# Altium PCB StepperControllerNema11.PcbDoc
Units mm, origin at the board's own origin, x right, y up, seen from the top; angles counter-clockwise.
Board outline 28 x 28 mm, 2 copper layers (Top Layer, Bottom Layer); 16 components, 19 nets, 72 pads, 34 vias.
Unrouted connection lines stored in the file: 3.
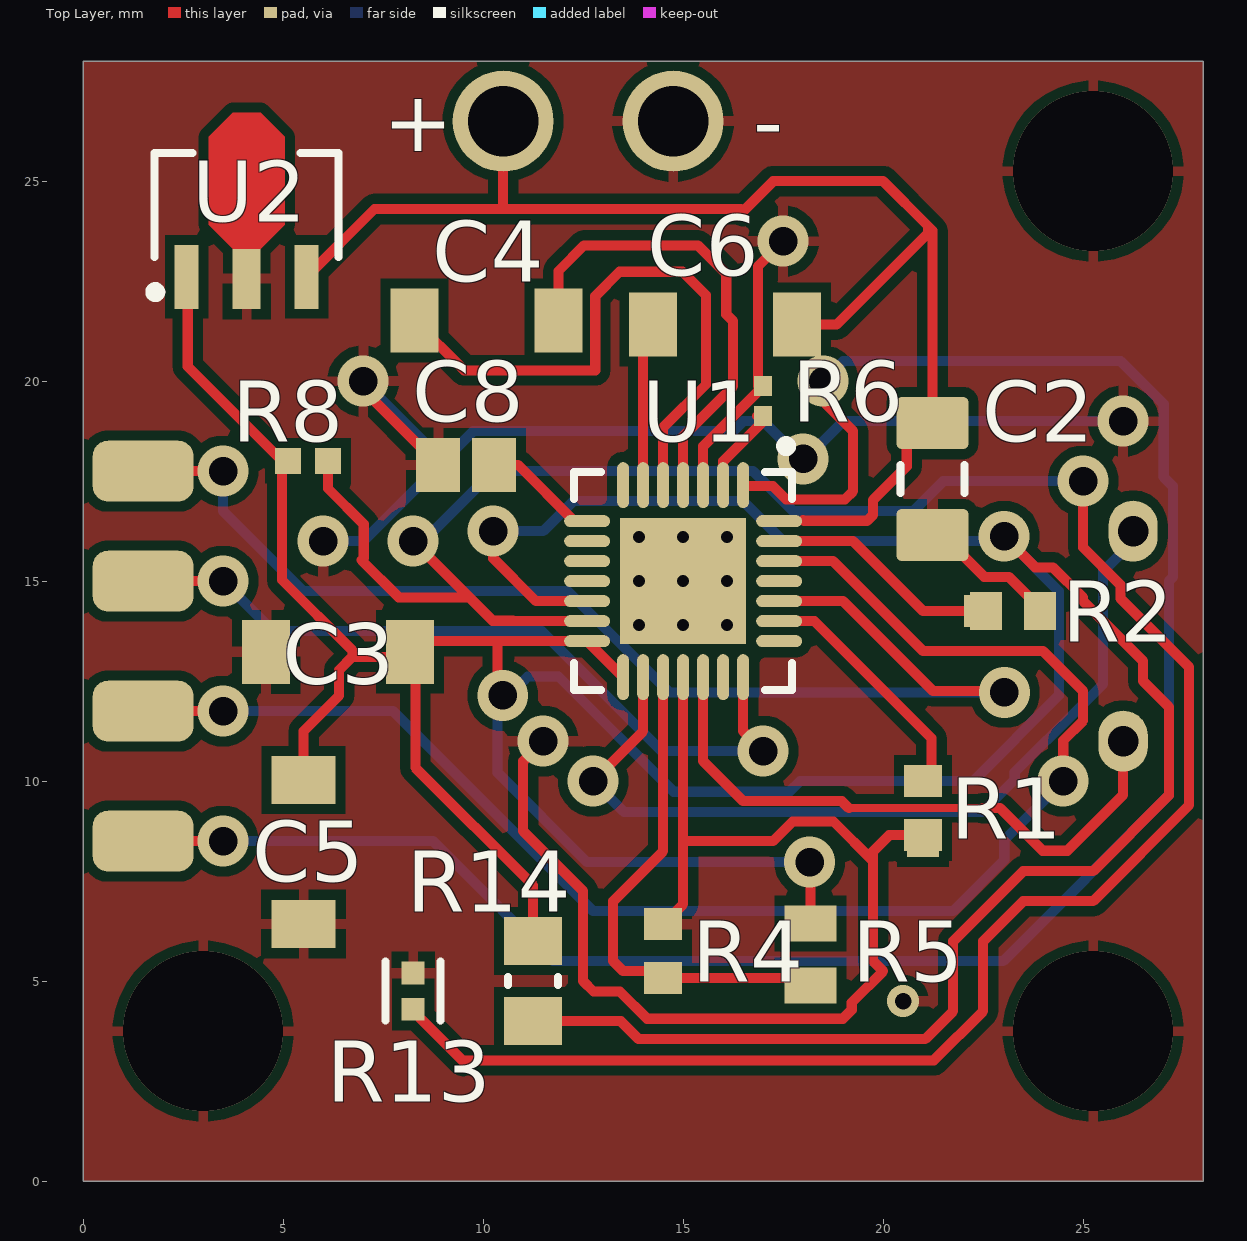
[diagram p0: Top Layer view]
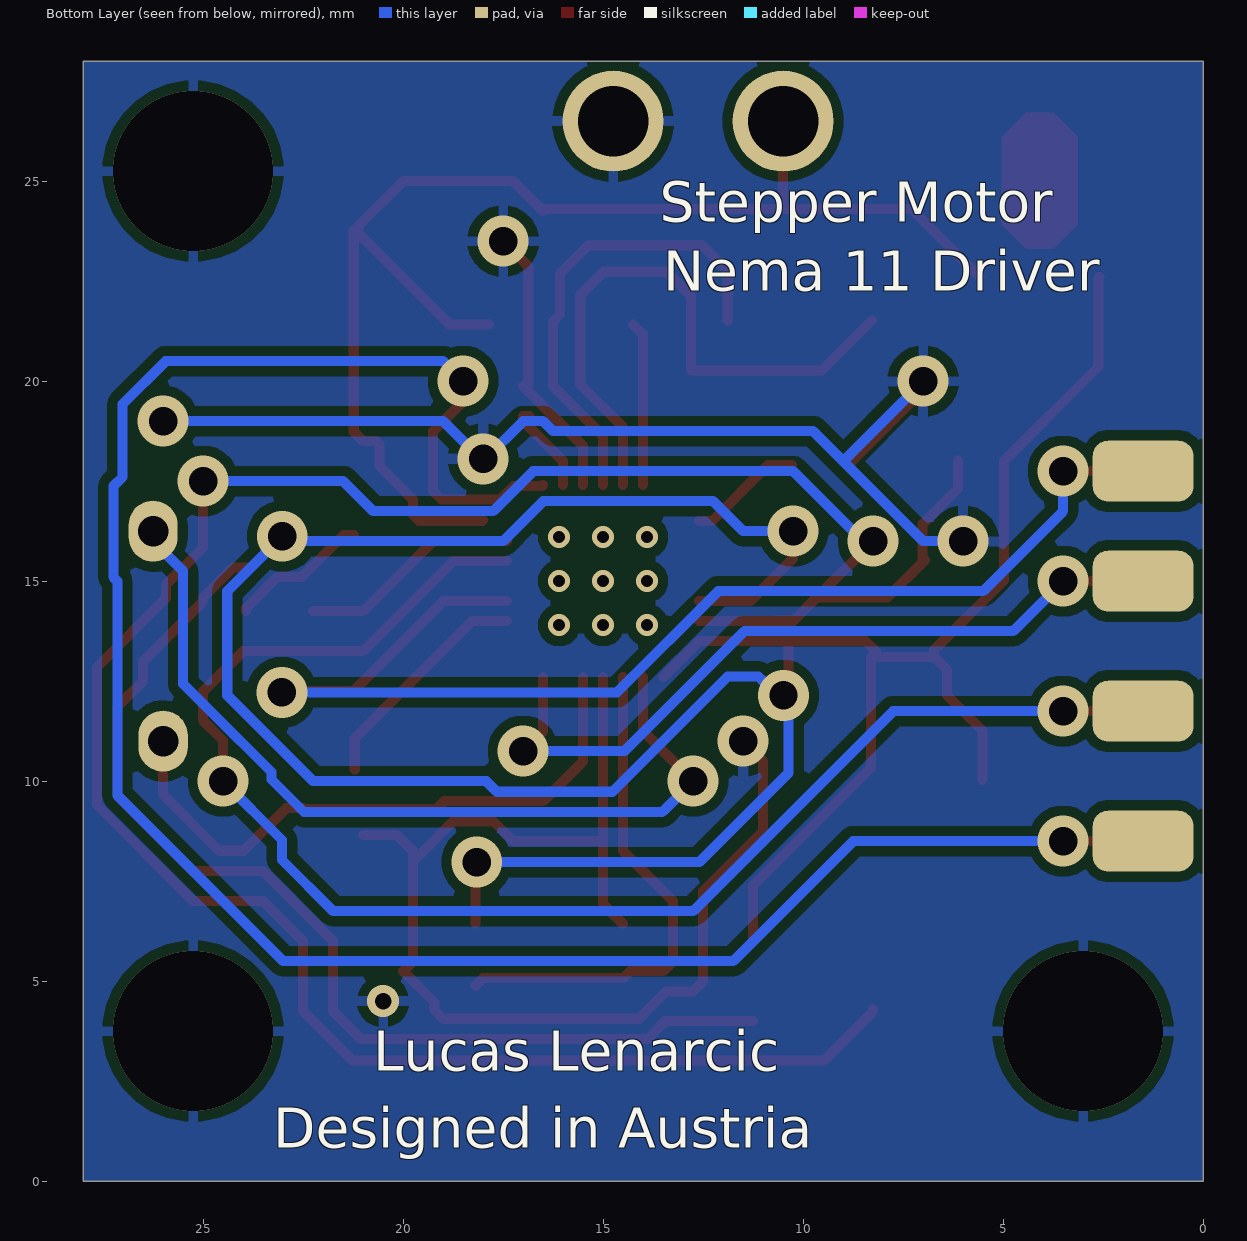
[diagram p1: Bottom Layer view, seen from below]

## Layer stack, top to bottom
Top Solder: solder mask 0.0102, Solder Resist, Dk 3.5
Top Layer: signal copper 0.0356
Dielectric 1: dielectric 0.32, FR-4, Dk 4.8
Bottom Layer: signal copper 0.0356
Bottom Solder: solder mask 0.0102, Solder Resist, Dk 3.5

## Board outline
0,0 28,0 28,28 0,28

## Design rules (kind name [scope] priority, off if disabled: settings)
AssemblyTestPointUsage AssemblyTestPointUsage_1 [All] p2:
AssemblyTestpoint AssemblyTestpoint_1 [All] p2: testpointundercomponent=TRUE minsize=1.016 maxsize=2.54 preferedsize=1.524 minholesize=0 maxholesize=1.016 preferedholesize=0.813 testpointgrid=0.025 usegrid=TRUE gridtolerance=0 allowsidetop=TRUE allowsidebottom=TRUE
Clearance [All] p1: gap=0.254 ignorepadtopadclearanceinfootprint=FALSE except(0: Arc-Hole Track-Hole SMDPad-Hole THPad-Hole Via-Hole Fill-Hole Poly-Hole Region-Hole Text-Hole)
Clearance Clearance_1 [All] p2: gap=0.254 ignorepadtopadclearanceinfootprint=FALSE except(0: Arc-Hole Track-Hole SMDPad-Hole THPad-Hole Via-Hole Fill-Hole Poly-Hole Region-Hole Text-Hole)
ComponentClearance ComponentClearance_1 [All] p2: gap=0.254 collisioncheckmode=3 verticalgap=0.254 showdistances=FALSE
DiffPairsRouting DiffPairsRouting_1 [All] p2: maxlimit=0.254 minlimit=0.254 mostfreqgap=0.254 toplayer_minwidth=0.381 toplayer_maxwidth=0.381 toplayer_prefwidth=0.381 bottomlayer_minwidth=0.381 bottomlayer_maxwidth=0.381 bottomlayer_prefwidth=0.381 maxuncoupledlength=12.7
FabricationTestPointUsage FabricationTestPointUsage_1 [All] p2: valid=0 allowmultiple=FALSE
FabricationTestpoint FabricationTestpoint_1 [All] p2: side=3 testpointundercomponent=TRUE minsize=1.016 maxsize=2.54 preferedsize=1.524 minholesize=0 maxholesize=1.016 preferedholesize=0.813 testpointgrid=0.025 allowsidetop=TRUE allowsidebottom=TRUE usegrid=TRUE gridtolerance=0
FanoutControl Fanout_LCC [IsLCC] p1: bgadir=Out bgaviamode=Centered fanoutstyle=Auto fanoutdirection=Alternating viagrid=0.025 // Fanout_LCC (Default Rule)
FanoutControl Fanout_BGA [IsBGA] p2: bgadir=Out bgaviamode=Centered fanoutstyle=Auto fanoutdirection=Alternating viagrid=0.025 // Fanout_BGA (Default Rule)
FanoutControl Fanout_Default [All] p4: bgadir=Out bgaviamode=Centered fanoutstyle=Auto fanoutdirection=Alternating viagrid=0.025 // Fanout_Default (Default Rule)
FanoutControl Fanout_Small [(CompPinCount < 5)] p5: bgadir=Out bgaviamode=Centered fanoutstyle=Auto fanoutdirection=OutThenIn viagrid=0.025 // Fanout_Small (Default Rule)
FanoutControl Fanout_BGA_1 [IsBGA] p6: bgadir=Out bgaviamode=Centered fanoutstyle=Auto fanoutdirection=Alternating viagrid=0.025 // Fanout_BGA (Default Rule)
FanoutControl Fanout_LCC_1 [IsLCC] p7: bgadir=Out bgaviamode=Centered fanoutstyle=Auto fanoutdirection=Alternating viagrid=0.025 // Fanout_LCC (Default Rule)
FanoutControl Fanout_SOIC_1 [IsSOIC] p8: bgadir=Out bgaviamode=Centered fanoutstyle=Auto fanoutdirection=Alternating viagrid=0.025 // Fanout_SOIC (Default Rule)
FanoutControl Fanout_Small_1 [(CompPinCount < 5)] p9: bgadir=Out bgaviamode=Centered fanoutstyle=Auto fanoutdirection=OutThenIn viagrid=0.025 // Fanout_Small (Default Rule)
FanoutControl Fanout_Default_1 [All] p10: bgadir=Out bgaviamode=Centered fanoutstyle=Auto fanoutdirection=Alternating viagrid=0.025 // Fanout_Default (Default Rule)
Height Height_1 [All] p2: minheight=0 maxheight=25.4 prefheight=12.7
HoleSize HoleSize_1 [All] p2: absolutevalues=TRUE maxlimit=2.54 minlimit=0.025 maxpercent=80.000 minpercent=20.000
HoleToHoleClearance HoleToHoleClearance_1 [All] p2: gap=0.254 allowstackedmicrovias=TRUE
LayerPairs LayerPairs_1 [All] p2: enforce=TRUE
MinimumSolderMaskSliver MinimumSolderMaskSliver_1 [All] p2: minsoldermaskwidth=0.254
NetAntennae NetAntennae_1 [All] p2: netantennaetolerance=0
PasteMaskExpansion PasteMaskExpansion_1 [All] p2: expansion=0
PlaneClearance PlaneClearance_1 [All] p2: clearance=0.508
PlaneConnect PlaneConnect_1 [All] p2: planeconnectstyle=Relief reliefexpansion=0.508 reliefentries=4 reliefconductorwidth=0.254 reliefairgap=0.254
PolygonConnect [All] p1: connectstyle=Relief reliefconductorwidth=0.254 reliefentries=4 polygonreliefangle="90 Angle" airgapwidth=0.254
PolygonConnect PolygonConnect_1 [All] p2: connectstyle=Relief reliefconductorwidth=0.254 reliefentries=4 polygonreliefangle="90 Angle" airgapwidth=0.254
RoutingCorners RoutingCorners_1 [All] p2: cornerstyle=45-Degree minsetback=2.54 maxsetback=2.54
RoutingLayers RoutingLayers_1 [All] p2: top layer_v5=TRUE bottom layer_v5=TRUE
RoutingPriority RoutingPriority_1 [All] p2: routingpriority=0
RoutingTopology RoutingTopology_1 [All] p2: topology=Shortest
RoutingVias [All] p1: holewidth=0.711 width=1.27 viastyle="Through Hole" minholewidth=0.711 minwidth=1.27 maxholewidth=0.711 maxwidth=1.27
RoutingVias RoutingVias_1 [All] p2: holewidth=0.711 width=1.27 viastyle="Through Hole" minholewidth=0.711 minwidth=1.27 maxholewidth=0.711 maxwidth=1.27
ShortCircuit ShortCircuit_1 [All] p2: allowed=FALSE
SilkToBoardRegionClearance SilkToBoardRegionClearance_1 [All] p2:
SilkToSilkClearance SilkToSilkClearance_1 [All] p2: silktosilkclearance=0.254
SilkToSolderMaskClearance SilkToSolderMaskClearance_1 [IsPad] p2: minsilkscreentomaskgap=0.254 clearancetoexposedcopper=TRUE
SolderMaskExpansion [All] p1: expansion=0.102 istentingtop=FALSE
SolderMaskExpansion SolderMaskExpansion_1 [All] p2: expansion=0.102 istentingtop=FALSE
UnRoutedNet UnRoutedNet_1 [All] p2:
UnpouredPolygon UnpouredPolygon_1 [All] p2:
Width [All] p1: maxlimit=0.254 minlimit=0.254 preferedwidth=0.254
Width Width_1 [All] p2: maxlimit=0.254 minlimit=0.254 preferedwidth=0.254
26 further rules are at their usual default settings.

## Components (designator, comment, footprint, x,y, rotation, side; value= is the part's Value field where it differs from the comment)
C2 "0.33uF" PCB-w610zufupuummbghd1in-1 21.234,17.551 r90 top
C3 "0.1uF" PCB-lcc7kuvv5qjd2xw4yurg-1 6.375,13.233 r0 top
C4 "0,1uF" PCB-lcc7kuvv5qjd2xw4yurg-1 10.084,21.514 r0 top
C5 "0.1uF" PCB-lcc7kuvv5qjd2xw4yurg-1 5.512,8.23 r90 top
C6 "0.1uF" PCB-lcc7kuvv5qjd2xw4yurg-1 16.053,21.412 r180 top
C8 "0.22uF" CAPC2013X140X50LL20T25 9.576,17.907 r0 top
R1 "ERJ-L03KJ50MV" RESC1608X55X30NL15T15 21,9.325 r90 top
R2 "ERJ-L03KJ50MV" RESC1608X55X30NL15T15 23.25,14.25 r180 top
R4 "Panasonic ERJ-3GEYJ161V" RESC1608X55X30NL15T15 14.5,5.75 r270 top
R5 "20k" RESC2013X55X40LL15T20 18.186,5.664 r90 top
R6 "100K" PCB-n97kkldbbf5rklmnt71m-1 17,19.5 r270 top
R8 "1Ohm No short circuit" RESC1005X40X25ML05T05 5.624,18.009 r180 top
R13 "10k" FP-CRCW0402-e3-IPC_B 8.25,4.75 r270 top
R14 "100kOhm" RESC2013X60X35ML10T20 11.25,5 r90 top
U1 "A4988" ALEG-ET-28_V 15,15 r270 top
U2 "onsemi MC78L05ACHT1G" NXP-SOT89_A_M 4.089,24.257 r90 top

## Footprints (in the part's own frame and the unit in brackets; to place one, negate y for a bottom-side part, rotate by r counter-clockwise, add the part's x,y. Pads: shape width x height; smd on the part's side, far side on the other; paste and mask are expansions set on the pad)
ALEG-ET-28_V [mm] "QFN, 28-Leads, Body 5.15x5.15mm, Pitch 0.5mm, Thermal Pad 3.15x3.15mm"
  oval 1.15x0.3 smd mask+0.051: 1(-2.4,1.5) 2(-2.4,1) 3(-2.4,0.5) 4(-2.4,0) 5(-2.4,-0.5) 6(-2.4,-1) 7(-2.4,-1.5) 15(2.4,-1.5) 16(2.4,-1) 17(2.4,-0.5) 18(2.4,0) 19(2.4,0.5) 20(2.4,1) 21(2.4,1.5)
  oval 0.3x1.15 smd mask+0.051: 8(-1.5,-2.4) 9(-1,-2.4) 10(-0.5,-2.4) 11(0,-2.4) 12(0.5,-2.4) 13(1,-2.4) 14(1.5,-2.4) 22(1.5,2.4) 23(1,2.4) 24(0.5,2.4) 25(0,2.4) 26(-0.5,2.4) 27(-1,2.4) 28(-1.5,2.4)
  rect 3.15x3.15 smd mask+0.051: 29(0,0)
  silkscreen extent -3.5,-2.72 2.72,2.72, body extent -2.58,-2.58 2.58,2.58, height 1
CAPC2013X140X50LL20T25 [mm] "CAPC2013X140X50LL20T25"
  rect 1.1x1.35 smd: 1(-0.7,0) 2(0.7,0)
  body extent -1.1,-0.72 1.1,0.72, height 1.4
FP-CRCW0402-e3-IPC_B [mm]
  rect 0.568x0.572 smd paste+0 mask+0: 1(-0.452,0) 2(0.452,0)
  silkscreen extent -0.74,-0.69 0.74,0.69
NXP-SOT89_A_M [mm] "SOT89, 3-Leads, Body 4.6x2.6mm, Pitch 1.5mm, IPC Low Density"
  rect 1.6x0.6 smd: 1(-1.65,1.5) 3(-1.65,-1.5)
  rect 1.5x0.7 smd: 2(-1.7,0)
  Top Layer region: -0.95,0.35 -0.35,0.95 1.85,0.95 2.45,0.35 2.45,-0.35 1.85,-0.95 -0.35,-0.95 -0.95,-0.35
  silkscreen extent -2.16,-2.3 1.45,2.41, body extent -1.15,-2.3 1.45,2.3, height 1.6
PCB-lcc7kuvv5qjd2xw4yurg-1 [mm]
  rect 1.2x1.6 smd: 1(-1.8,0) 2(1.8,0)
  body extent -1.65,-0.9 1.55,0.9, height 1.55
PCB-n97kkldbbf5rklmnt71m-1 [mm] "RESC1005X37X25LL05T10"
  rect 0.5x0.45 smd: 1(-0.375,0) 2(0.375,0)
  body extent -0.53,-0.27 0.53,0.28, height 0.35
PCB-w610zufupuummbghd1in-1 [mm]
  rrect20% 1.3x1.8 smd: 1(-1.4,0) 2(1.4,0)
  silkscreen extent -0.35,-0.8 0.35,0.8, body extent -1.7,-0.9 1.7,0.9, height 1.78
RESC1005X40X25ML05T05 [mm] "Chip Resistor, 2-Leads, Body 1.00x0.50mm, IPC Low Density"
  rect 0.65x0.65 smd: 1(-0.5,0) 2(0.5,0)
  body extent -0.53,-0.27 0.53,0.28, height 0.4
RESC1608X55X30NL15T15 [mm] "Chip Resistor, 2-Leads, Body 1.60x0.80mm, IPC Medium Density"
  rect 0.8x0.95 smd: 1(-0.675,0) 2(0.675,0)
  body extent -0.87,-0.48 0.87,0.48, height 0.55
RESC2013X55X40LL15T20 [mm] "RESC2013X55X40LL15T20"
  rect 0.9x1.3 smd: 1(-0.775,0) 2(0.775,0)
  body extent -1.07,-0.7 1.07,0.7, height 0.55
RESC2013X60X35ML10T20 [mm] "Chip Resistor, 2-Leads, Body 2.1x1.35mm, IPC Low Density"
  rect 1.2x1.45 smd: 1(-1,0) 2(1,0)
  silkscreen extent -0.1,-0.63 0.1,0.62, body extent -1.05,-0.68 1.05,0.67, height 0.6

## Part data
C2: library part CMP-6acba34cbf0cb50c-1, "CL31 Series 0.33 uF 50 V ±10 % Tolerance X7R SMT Multilayer Ceramic Capacitor", Capacitance="330 nF", Capacitance Tolerance=±10%, Case/Package=1206, Dielectric Characteristic=X7R, Manufacturer Part Number=CL31B334KBFNNNE, Voltage Rating (DC)="50.0 V", Lead-Free Status="Lead Free", Mounting Style="Surface Mount", Octopart URL=https://octopart.com/cl31b334kbfnnne-samsung-9302177, OctopartID=6acba34cbf0cb50c, RoHS=Compliant
C3 C4 C5 C6: library part CMP-915a59dc44ec4e9d-4, "C Series 1206 0.1 uF 50 V ±5 % Tolerance C0G SMT Multilayer Ceramic Capacitor"
C8: library part CMP-3551434-4, "Multilayer Ceramic Capacitors MLCC - SMD/SMT 50volts .22uF 5% X7R 7inch reel", Capacitance="2.2e-07 F", Capacitance Tolerance=±5%, Case/Package=0805, Dielectric Characteristic=X7R, Manufacturer Part Number=08055C224JAT2A, Voltage Rating (DC)="50.0 V", Lead-Free Status="Lead Free", Mounting Style="Surface Mount", Number of Pins=2, Octopart URL=https://octopart.com/08055c224jat2a-avx+interconnect+%2F+elco-8665279, OctopartID=61bba8357c62be7c, RoHS=Compliant
R1 R2: library part CMP-2000-00868-1, Manufacturer=Panasonic, Part Number=ERJ-L03KJ50MV
R4: library part CMP-3677770-2, "Thick Film Resistors - SMD 0603 160ohms 5% Tol", Case/Package=0603, Manufacturer Part Number=ERJ-3GEYJ161V, Power Rating="0.1 W", Resistance="160.0 Ω", Resistance Tolerance=±5%, Voltage Rating (DC)="75.0 V", Lead-Free Status="Lead Free", Lifecycle Status="Not Listed by Manufacturer", Mounting Style="Surface Mount", Octopart URL=https://octopart.com/erj-3geyj161v-panasonic-39786526, OctopartID=556f9e3a68178aa8, Packaging="Cut Tape (CT)", REACH SVHC Compliance="No SVHC", RoHS=Compliant, Size-Height="0.00045 m", Size-Length="0.0016 m", Size-Width="0.0008 m"
R5: library part CMP-15323555-2, Case/Package=0805, Manufacturer Part Number=TNPW080520K0BEEA, Power Rating="0.125 W", Resistance="20000.0 Ω", Resistance Tolerance=±0.1%, Voltage Rating (DC)="100.0 V", Lead-Free Status="Lead Free", Number of Pins=2, Octopart URL=https://octopart.com/tnpw080520k0beea-vishay-46507859, OctopartID=596b92a4db5e86ac, RoHS=Compliant
R6: library part CMP-86ed4a8b7141592a-1, "Res General Purpose Thick Film 0402 100k Ohm 1% 1/16W ±100ppm/°C Molded Paper T/R", Case/Package=0402, Manufacturer Part Number=CRGCQ0402F100K, Power Rating="63.0 mW", Resistance="100 kΩ", Resistance Tolerance=±1%, Temperature Coefficient="-100 ppm/°C to 100 ppm/°C", Voltage Rating (DC)="50.0 V", Lifecycle Status="Not Listed by Manufacturer", Octopart URL=https://octopart.com/crgcq0402f100k-te+connectivity-91017930, OctopartID=86ed4a8b7141592a, Packaging="Tape & Reel (TR)", RoHS=Compliant
R8: library part CMP-2002-08342-1, Manufacturer="Vishay Dale", Part Number=CRCW04021R00FKED
R13: library part CMP-2002-08135-2, "RES SMD 10K OHM 1% 1/16W 0402", Case Code (Imperial)=0402, Case Code (Metric)=1005, Max Operating Temperature=155°C, Max Power Dissipation=63mW, Min Operating Temperature=-55°C, Package Quantity=10, Resistance=10kR, Temperature Coefficient=100ppm/°C, Tolerance=1%, Voltage Rating=50V, Case/Package=0402, Composition="Thick Film", Contact Plating=Tin, Depth=0.5mm, Features="Automotive AEC-Q200", Height=0.35mm, Lead Free="Lead Free", Length=1mm, Military Standard=Not, Mount="Surface Mount", Number of Pins=2, Number of Terminations=2, Packaging="Tape and Reel", Power Rating=63mW, Radiation Hardening=No, Termination=SMD/SMT, Voltage Rating (DC)=50V, Weight=2.3E-05oz, Width=0.02inch
R14: library part CMP-2100-03668-1, "Chip Resistor, 100 KOhm, +/- 1%, 0.125 W, -55 to 155 degC, 0805 (2012 Metric), RoHS, Tape and Reel", Case Code (Imperial)=0805, Case Code (Metric)=2012, Manufacturer=Yageo, Max Operating Temperature=155degC, Max Power Dissipation=125mW, Min Operating Temperature=-55degC, Package Description="2-Pin Surface Mounted Device, Body 2 x 1.25 mm", Package Quantity=1, Resistance=100KOhm, Temperature Coefficient=100ppm/degreesC, Tolerance=1%, Voltage Rating=150V, Case/Package=0805, Composition=ThickFilm, Datasheet URL=http://www.yageo.com/NewPortal/yageodocoutput?fileName=/pdf/R-Chip/PYu-RC_Group_51_RoHS_L_5.pdf, Datasheet Version="Rev. 5, 10/2016", Depth=1.25mm, Height=0.024inch, Lead Free=LeadFree, Lead Pitch=0.4mm, Length=2mm, Manufacturer URL=http://www.yageo.com/, Military Standard=Not, Number of Pins=2, Number of Terminations=2, Package Reference=0805, Packaging=TapeandReel, Power Rating=125mW, REACH SVHC=Unknown, RoHSCompliant=true, Termination=SMD/SMT, Voltage Rating (DC)=150V, Width=0.049inch
U1: library part CMP-966506-24, "DMOS Microstepping Driver with Translator and Overcurrent Protection, 3 to 5.5 V, -20 to 85 degC, 28-Pin QFN (ET), RoHS, Tape and Reel"
U2: library part CMP-4fb3855e828b9074-8, "Linear Voltage Regulator, 100 mA, 5 to 24 V, Positive Vout: 5.0 V; TJ = 0°C to +125°C", Manufacturer Part Number=MC78L05ACHT1G, Operating Temperature="0.00 °C (min)", Output Current="100 mA", Lead-Free Status="Lead Free", Lifecycle Status=Active, Octopart URL=https://octopart.com/mc78l05acht1g-onsemi-65529950, OctopartID=4fb3855e828b9074, Packaging="Cut Tape (CT)", RoHS=Compliant

## Free pads (board coordinates)
  rrect50% 2.524x1.524 all layers, no hole: 1(1.5,17.75) 2(1.5,15) 3(1.5,11.75) 4(1.5,8.5)
  round 2.524 hole 1.762: 5(10.5,26.5) 6(14.75,26.5)
  oval 1.224x1.524 hole 0.762: 7(26.25,16.25)
  oval 1.24x1.524 hole 0.762: 8(26,11)
  rect 0.8x0.8 smd: 9(21,8.5) 9(21,10) 9(22.425,14.25) 9(23.925,14.25)

## Via types
v1: diameter 1.27, hole 0.711, Top Layer to Bottom Layer, 21 vias
v2: diameter 0.55, hole 0.3, Top Layer to Bottom Layer, 9 vias
v3: diameter 4, hole 4, Top Layer to Bottom Layer, 3 vias
v4: diameter 0.8, hole 0.411, Top Layer to Bottom Layer, 1 vias

## Nets (pads, with @x,y where several pads share a name; then routed paths per layer and width w, separated by ;. In a path a pad name is that pad's centre, name@x,y a point inside that pad or via, vN(x,y) a via of type N, cw(c..) or ccw(c..) an arc to the next point about the centre after c; other vN are vias at no path point)
1A: pad.1 U1.24 | length 31.8
  Top Layer w0.254: pad.1 v1(3.5,17.75) ; U1.24 19,14.5 21.25,12.25 23,12.25 v1(23.032,12.218)
  Bottom Layer w0.254: v1(3.5,17.75) 3.5,16.75 5.5,14.75 12.122,14.75 14.654,12.218 22.562,12.218 22.75,12.406 22.75,12.5 v1@23.391,11.859
1B: pad.2 U1.21 | length 19.3
  Top Layer w0.254: pad.2 v1(3.5,15) ; U1.21 16.5,11.25 v1(17,10.75)
  Bottom Layer w0.254: v1(3.5,15) 4.75,13.75 11.468,13.75 14.468,10.75 v1(17,10.75)
2A: pad.3 U1.26 | length 38.1
  Top Layer w0.254: pad.3 v1(3.5,11.75) ; U1.26 18.75,15.5 21,13.25 24,13.25 25,12.25 25,11.512 24.504,11.016 24.504,10.004 v1(24.5,10)
  Bottom Layer w0.254: v1(3.5,11.75) 7.75,11.75 12.75,6.75 21.75,6.75 23.028,8.028 23.028,8.528 v1(24.5,10)
2B: pad.4 U1.1 | length 53.7
  Top Layer w0.254: pad.4 v1(3.5,8.5) ; U1.1 16.521,17.379 17.239,17.379 17.579,17.039 19.039,17.039 19.25,17.25 19.25,18.75 18.5,19.5 v1(18.5,20)
  Bottom Layer w0.254: v1(3.5,8.5) 8.75,8.5 11.75,5.5 23,5.5 27.143,9.643 27.143,15 27.243,15.1 27.243,17.373 27.016,17.6 27.016,19.421 25.937,20.5 19,20.5 v1(18.5,20)
DIR: pad.8 U1.19 | length 15.5
  Top Layer w0.204: 19.143,9.325 22.5,9.325
  Top Layer w0.254: U1.19 15.5,10.5 16.5,9.5 17.5,9.5 ; 17.5,9.5 18.968,9.5 19.143,9.325 ; 22.5,9.325 22.925,9.325 23.992,8.258 24.602,8.258 26,9.656 pad.8
Ena: R6.2 U1.2 | length 2.3
  Top Layer w0.254: U1.2 16,18 17,19 R6.2 R6.2@16.845,19.125
GND: C2.1 C3.1 C5.1 C8.1 pad.6 R1.1 R2.1 R4.1 R6.1 R13.1 U1.3 U1.18 U2.2 | length 70
  Top Layer w0.254: v1(7,20) 7,19.783 C8.1 ; v1(11.5,11) 11,10.5 11,8.75 12.5,7.25 12.5,5 12.758,4.742 13.419,4.742 14.103,4.058 18.994,4.058 19.217,4.281 19.217,4.467 20,5.25 19.75,5.5 19.75,8 ; R4.1 15,6.925 U1.18 ; 15.008,8.5 17.249,8.5 17.74,8.992 18.758,8.992 19.75,8 ; U1.3 15.5,18.375 R6.1 16.872,19.875 16.872,22.872 v1(17.5,23.5) ; R1.1 20.15,8.65 19.75,8.25 19.75,8 ; C2.1 21.484,16.151 22.53,15.106 23.144,15.106 23.925,14.325 R2.1
  Bottom Layer w0.254: v1(6,16) 7,16 9,18 ; v1(7,20) 9,18 ; v1@18,18 19,19 v1(26,19) ; v1(18,18.055) 17.945,18.055 17,19 16.5,19 16.25,18.75 9.75,18.75 9,18
  other v3: 3,3.75 25.25,3.75 25.25,25.25
  other v4: 20.5,4.5
NetC4_1: C4.1 U1.5 | length 15.3
  Top Layer w0.254: C4.1 9.528,20.269 12.802,20.269 12.802,22.123 13.411,22.733 14.986,22.733 15.57,22.149 15.57,19.914 14.5,18.843 U1.5
NetC4_2: C4.2 U1.4 | length 11.9
  Top Layer w0.254: C4.2 11.884,22.755 12.522,23.393 15.367,23.393 16.078,22.682 16.078,21.672 16.25,21.5 16.25,19.875 15,18.625 U1.4
NetC6_2: C6.2 U1.6 | length 4.1
  Top Layer w0.254: U1.6 14,21.159 C6.2
NetC8_2: C8.2 U1.8 | length 2.9
  Top Layer w0.254: C8.2 10.871,17.907 12.278,16.5 U1.8
NetR1_2: R1.2 U1.27 | length 5.6
  Top Layer w0.254: U1.27 19.25,16 21,14.25 22.25,14.25
NetR2_2: R2.2 U1.23 | length 5.8
  Top Layer w0.254: U1.23 18.283,14 21.209,11.074 21.209,10.287
NetR4_2: R4.2 R5.1 U1.17 | length 12.8
  Top Layer w0.254: U1.17 14.5,8.25 13.25,7 13.25,5.5 13.5,5.25 14.325,5.25 R4.2 18.001,5.075 R5.1 R5.1@18.175,4.878
NetR14_1: R14.1 U1.12 | length 65.3
  Top Layer w0.254: v1(10.25,16.25) 10.25,15.571 11.321,14.5 U1.12 ; R14.1 13.443,4 13.893,3.55 21.05,3.55 21.75,4.25 21.75,6 23.5,7.75 25.25,7.75 27.143,9.643 27.143,11.857 26.5,12.5 26.5,13 25,14.5 25,14.589 24.245,15.344 23.804,15.344 23.027,16.122 v1(23.023,16.122)
  Bottom Layer w0.254: v1(10.25,16.25) 11.5,16.25 12.25,17 16.5,17 17.5,16 22.901,16 v1(23.023,16.122) 24.395,14.751 24.395,12.145 22.25,10 17.923,10 17.657,9.734 14.766,9.734 11.883,12.617 11.117,12.617 11,12.5
ROSC: R8.1 R13.2 U1.13 | length 62.2
  Top Layer w0.254: R8.1 6.124,17.314 7.016,16.422 7.016,15.579 6.961,15.524 7.891,14.595 9.655,14.595 ; R13.2 8.25,4.25 9.5,3 9.519,3.019 21.269,3.019 22.5,4.25 22.5,6 23.5,7 25.25,7 27.651,9.401 27.651,12.849 25.931,14.569 25.931,14.908 25,15.839 v1(25,17.5) ; v1(8.25,16) 9.655,14.595 ; 10.75,14 U1.13 ; 10.75,14.008 10.242,14.008 9.655,14.595
  Bottom Layer w0.254: v1(8.25,16) 8.5,16 10.25,17.75 16.75,17.75 17.75,16.75 20.75,16.75 21.5,17.5 v1(25,17.5)
STEP: pad.7 U1.16 | length 22.1
  Top Layer w0.254: v1(12.75,10) 14,11.25 U1.16
  Bottom Layer w0.254: v1(12.75,10) 13.5,9.25 13.524,9.226 22.476,9.226 23.29,10.04 23.29,10.226 24.079,11.016 24.088,11.016 25.5,12.429 25.5,15.25 26.5,16.25 pad.7
VDD: C3.2 C5.2 R5.2 R8.2 R14.2 U1.15 U2.1 | length 44
  Top Layer w0.254: U2.1 2.616,22.58 2.616,20.498 2.616,20.366 4.974,18.009 4.974,15.026 6.731,13.269 6.731,13.106 ; C5.2 5.512,11.252 6.401,12.141 6.401,12.776 6.731,13.106 ; C3.2@8.175,13.106 6.731,13.106 ; C3.2 8.442,13.5 10.363,13.5 ; C3.2@8.306,13.103 8.306,10.338 11.25,7.394 R14.2 ; v1(10.49,12.141) 10.363,12.268 10.363,13.5 ; U1.15 12.6,13.5 10.363,13.5 ; v1(18.161,7.976) 18.186,7.95 R5.2
  Bottom Layer w0.254: v1(10.49,12.141) 10.363,12.014 10.363,10.211 12.598,7.976 v1(18.161,7.976)
Vin: C2.2 C6.1 pad.5 U1.28 U2.3 | length 33.5
  Top Layer w0.254: U2.3 7.286,24.304 10.5,24.304 ; pad.5 10.5,24.304 ; C6.1 18.834,21.412 21.12,23.698 21.12,23.766 21.12,23.88 ; 18,16.531 18.023,16.508 19.601,16.508 19.75,16.657 19.75,17.032 20.591,17.873 20.591,18.429 20.663,18.5 21,18.5 21.234,18.734 C2.2 21.234,23.698 21.234,23.766 21.12,23.88 ; 10.5,24.304 16.447,24.304 16.5,24.25 17.25,25 20,25 21.12,23.88
pads on no net: U1.7 U1.9 U1.10 U1.11 U1.14 U1.20 U1.22 U1.25 U1.29
copper on no net:
  other v2: 13.9,13.9 15,13.9 16.1,13.9 13.9,15 15,15 16.1,15 13.9,16.1 15,16.1 16.1,16.1

## Polygon pours and split planes (outlines as drawn)
GND on Bottom Layer "Bottom Layer-GND" (solid, pour order 1): 0,28 28,28 28,0 0,0
GND on Top Layer "Top Layer-GND" (solid, pour order 0): 0,28 28,28 28,0 0,0

## Silkscreen, mask and mechanical layers (free items; w line width, h text height)
Top Overlay:
  text "+" at 7.504,25.75 h1.52
  text "-" at 16.754,25.742 h1.52
Bottom Overlay:
  text "Stepper Motor" at 13.583,23.981 h1
  text "Nema 11 Driver" at 13.496,22.254 h1
  text "Lucas Lenarcic" at 20.746,2.754 h1
  text "Designed in Austria" at 23.246,0.837 h1
Outline:
  lines w1.2: -0.6,0 ccw(c0,0) 0,-0.6 ; -0.6,0 ccw(c0,0) 0,-0.6 ; -0.6,0 -0.6,28 ; -0.6,28 cw(c0,28) 0,28.6 ; -0.6,28 cw(c0,28) 0,28.6 ; 0,-0.6 28,-0.6 ; 0,28.6 28,28.6 ; 28,-0.6 ccw(c28,0) 28.6,0 ; 28,-0.6 ccw(c28,0) 28.6,0 ; 28,28.6 cw(c28,28) 28.6,28 ; 28,28.6 cw(c28,28) 28.6,28 ; 28.6,0 28.6,28